# EAGLE board base_plate (EAGLE 7.6.0)

Size 341.63 x 201.93 mm. Coordinates in mm from the lower left corner, seen from the top.
Outline: 334.01,0 7.62,0 arc-90 0,7.62 0,194.31 arc-90 7.62,201.93 334.01,201.93 arc-90 341.63,194.31 341.63,7.62 arc-90 334.01,0
Copper layers (1*16): Top 0.035mm / dielectric 1.5mm / Bottom 0.035mm
Design rules "default": minimum track width 10mil, minimum drill 0.6mm, track to track 8mil, track to pad 8mil, pad to pad 8mil, via to via 8mil, smd to smd 8mil, copper to edge 40mil, drill to drill 8mil, minimum pad ring 10mil, minimum via ring 8mil, stop-mask expansion 4mil, vias tented up to drill 0mil, thermal gap 10mil

## Placement (x,y rotation side)
E$1  [MEAN_POWER_SUPPLY]  212.09,189.23 180 top
E$2  [MEAN_POWER_SUPPLY]  212.09,142.24 180 top
E$3  [AUDIO_AMP]  241.05,189.23 270 top
E$4  [AUDIO_AMP]  241.05,143.51 270 top
E$5  [AUDIO_AMP]  241.05,97.79 270 top
E$6  [AUDIO_AMP]  241.05,52.07 270 top
E$7  [TSUNAMI]  139.7,10.16 0 top

## Library data of the parts
E$1-E$7 = audiobatics